# Altium PCB DC-DC_10-40V_8A.PcbDoc
Units mm, origin at the board's own origin, x right, y up, seen from the top; angles counter-clockwise.
Board outline 47.43 x 22.75 mm, 2 copper layers (Top Layer, Bottom Layer); 20 components, 12 nets, 63 pads, 163 vias.
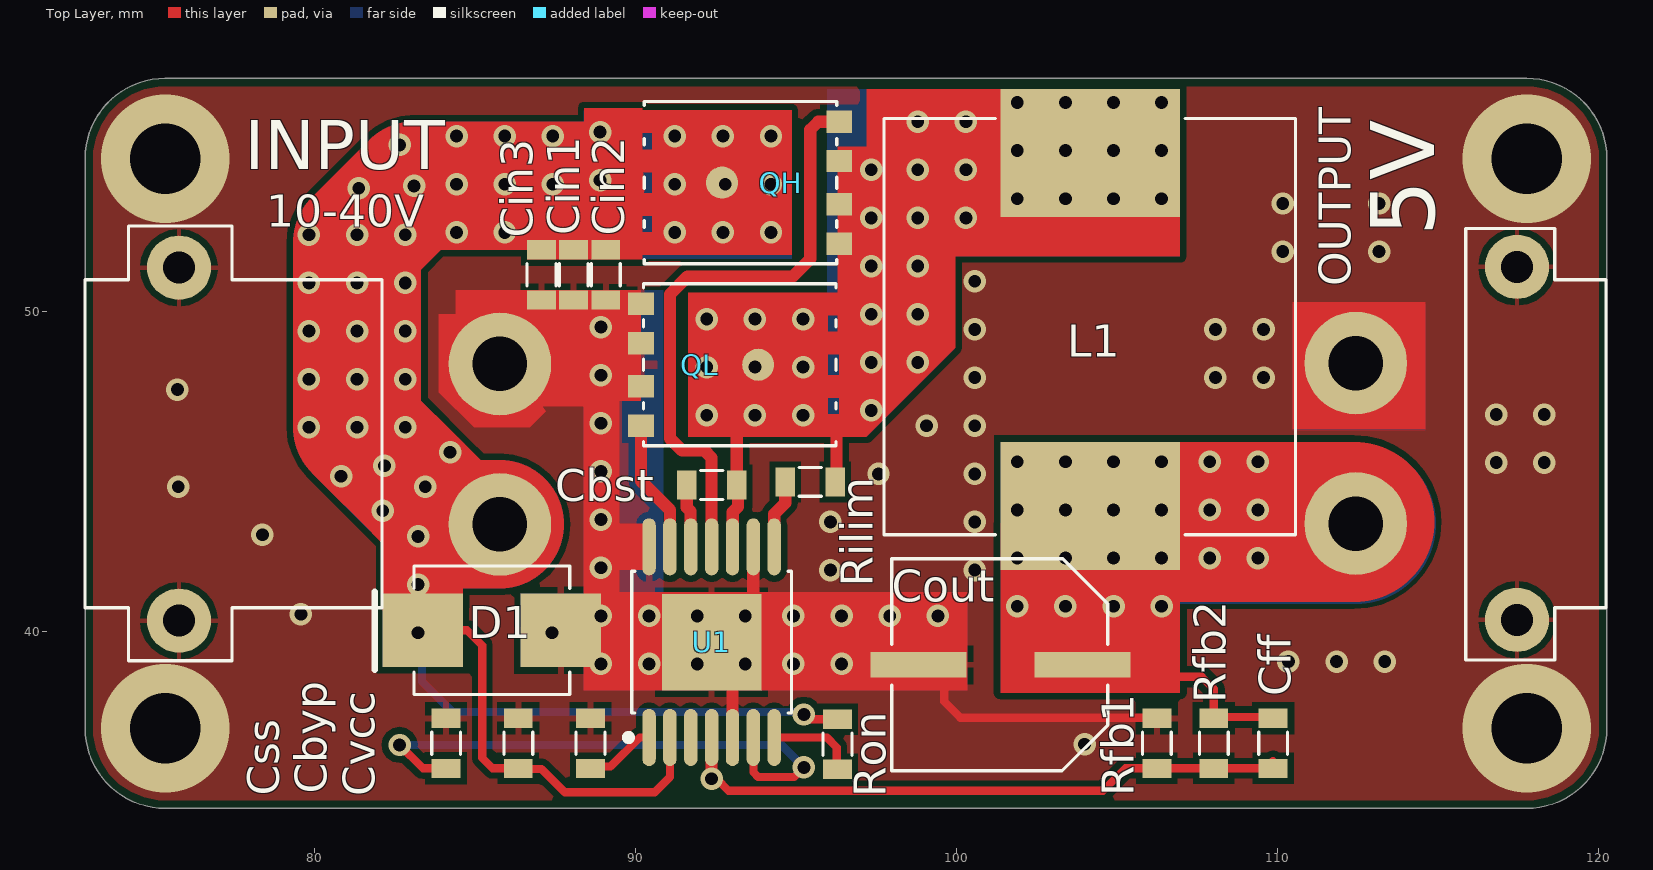
[diagram p0: Top Layer view]
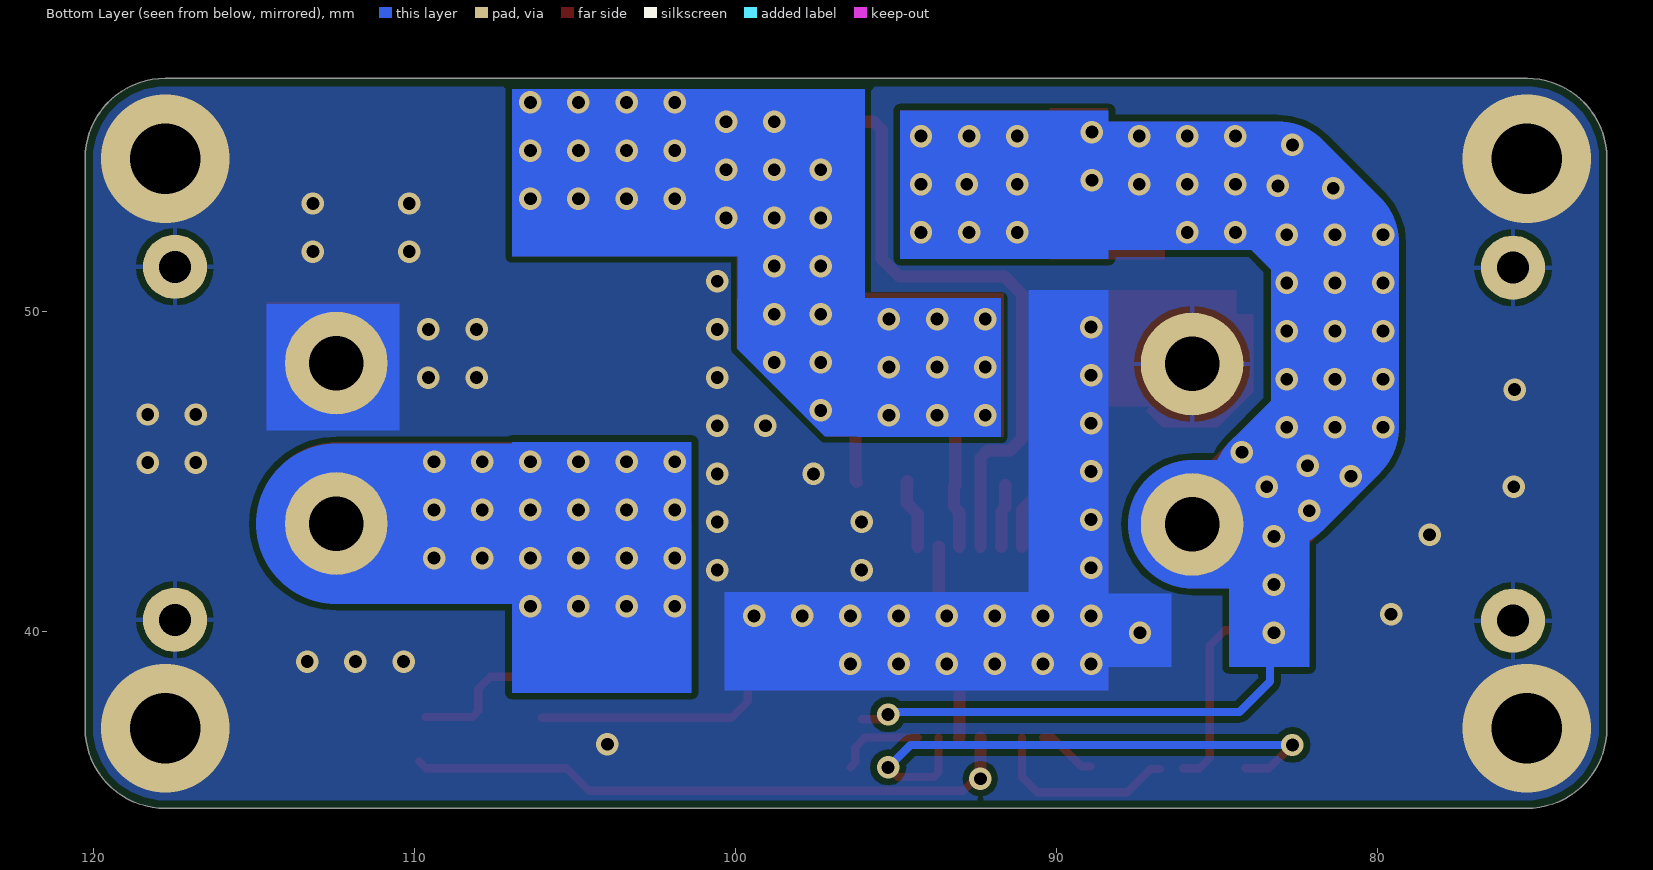
[diagram p1: Bottom Layer view, seen from below]
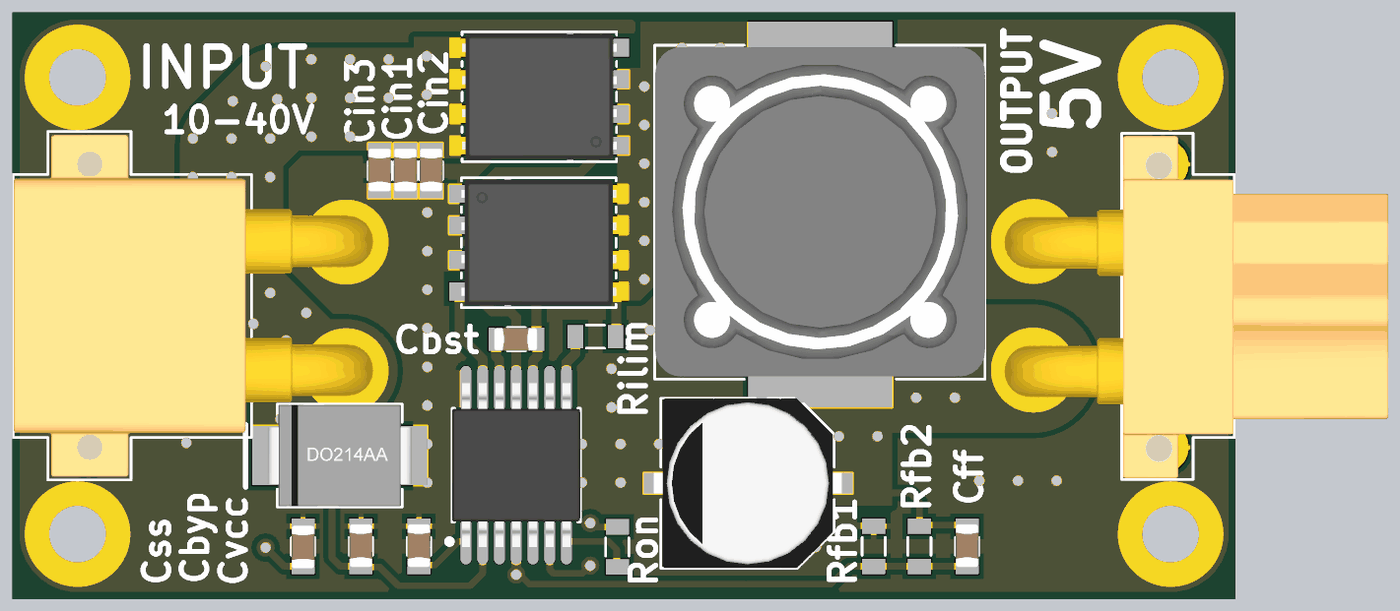
[diagram p2: 3D render of the assembled board from above, using the file's embedded part models]

## Layer stack, top to bottom
Top Solder: solder mask 0.0102, Solder Resist, Dk 3.5
Top Layer: signal copper 0.0356
Dielectric 1: dielectric 0.32, FR-4, Dk 4.8
Bottom Layer: signal copper 0.0356
Bottom Solder: solder mask 0.0102, Solder Resist, Dk 3.5

## Board outline
72.85,37 72.85,54.75 cw(c75.35,54.75) 75.35,57.25 75.325,57.25 117.775,57.25 cw(c117.775,54.75) 120.275,54.75 120.275,37 cw(c117.775,37) 117.775,34.5 117.825,34.5 75.35,34.5 cw(c75.35,37)

## Design rules (kind name [scope] priority, off if disabled: settings)
AcuteAngle [All] p1: minimum=3.50000000000000E+0001 checktracksonly=FALSE
BoardOutlineClearance "BoardOutlineClearance 1" [All] p1: gap=0.25 ignorepadtopadclearanceinfootprint=FALSE except(0: Arc-SplitContinuation Track-SplitContinuation SMDPad-SplitContinuation THPad-SplitContinuation Via-SplitContinuation Fill-SplitContinuation Poly-SplitContinuation Region-SplitContinuation Text-SplitContinuation) // Milling
Clearance "Clearance-1 1/2 Oz" [All] p1: gap=0.125 ignorepadtopadclearanceinfootprint=FALSE except(0.2: Arc-Fill Arc-Poly Track-Fill Track-Poly SMDPad-SMDPad SMDPad-Fill SMDPad-Poly THPad-Fill THPad-Poly Via-Fill Via-Poly Fill-Fill Fill-Poly Poly-Poly Poly-Region Poly-Text; 0.25: Arc-Hole Track-Hole SMDPad-Hole THPad-Hole Via-Hole Fill-Hole Poly-Hole Region-Hole Text-Hole) // Standart
ComponentClearance [All] p1: gap=0.1 collisioncheckmode=3 verticalgap=0.1 showdistances=FALSE
DiffPairsRouting "DiffPairsRouting 1/2 Oz" [All] p1: maxlimit=0.254 minlimit=0.125 mostfreqgap=0.254 toplayer_minwidth=0.125 toplayer_maxwidth=0.381 toplayer_prefwidth=0.381 bottomlayer_minwidth=0.125 bottomlayer_maxwidth=0.381 bottomlayer_prefwidth=0.381 maxuncoupledlength=12.7
HoleSize "Minimum HoleSize" [IsPad] p1: absolutevalues=TRUE maxlimit=5.9 minlimit=0.6 maxpercent=80.000 minpercent=20.000
HoleSize "Minimum HoleSize VIA 1" [IsVia] p2: absolutevalues=TRUE maxlimit=5.9 minlimit=0.3 maxpercent=80.000 minpercent=20.000 // Standart
HoleToHoleClearance Hole2HoleClearance [All] p1: gap=0.25 allowstackedmicrovias=FALSE
MinimumAnnularRing "Minimum AR VIA Standart" [All] p1: minimumring=0.15
MinimumAnnularRing "Minimum AR PAD Standart" [All] p2: minimumring=0.2
MinimumSolderMaskSliver "SolderMask Bridge Standart" [All] p1: minsoldermaskwidth=0.15 // All Masks
PlaneClearance "PlaneClearance-1 1/2 Oz" [All] p1: clearance=0.2 // Standart
PlaneConnect "TermalConnect-1 1/2 Oz" [All] p1: planeconnectstyle=Relief reliefexpansion=0.2 reliefentries=4 reliefconductorwidth=0.2 reliefairgap=0.2 // Standart
PolygonConnect "PolygonConnect-1 1/2 Oz" [All] p1: thpad.connectstyle=Relief thpad.reliefconductorwidth=0.15 thpad.reliefentries=4 thpad.polygonreliefangle="90 Angle" thpad.airgapwidth=0.2 smdpad.connectstyle=Relief smdpad.reliefconductorwidth=0.2 smdpad.reliefentries=4 smdpad.polygonreliefangle="90 Angle" smdpad.airgapwidth=0.2 via.connectstyle=Direct via.reliefconductorwidth=0.254 via.reliefentries=4 via.polygonreliefangle="90 Angle" via.airgapwidth=0.254 // Standart
RoutingCorners [All] p1 off: cornerstyle=45-Degree minsetback=2.54 maxsetback=2.54
RoutingVias [All] p1: holewidth=0.4 width=0.8 viastyle="Through Hole" minholewidth=0.3 minwidth=0.6 maxholewidth=5.9 maxwidth=8.9
SilkToSilkClearance Silk2SilkClearance [All] p1 off: silktosilkclearance=0.15
SilkToSolderMaskClearance Silk2SolderMaskClearance [IsPad] p1 off: minsilkscreentomaskgap=0.15 clearancetoexposedcopper=TRUE
SolderMaskExpansion SolderMaskExpansion-1 [All] p1: expansion=0.05 istentingtop=FALSE // Standart
UnRoutedNet [All] p1: checkbadconnections=TRUE
Width "Width 1/2 Oz" [All] p1: maxlimit=10 minlimit=0.125 preferedwidth=0.254 checkconnectedcopper=TRUE
19 further rules are at their usual default settings.

## Components (designator, comment, footprint, x,y, rotation, side; value= is the part's Value field where it differs from the comment)
Cbst "470nF" "0603 Capicator" 92.38,44.575 r180 top
Cbyp "0.1uF" "0603 Capicator" 86.35,36.525 r90 top
Cff "180pF" "0603 Capicator" 109.875,36.525 r90 top
Cin1 "10uF" "0603 Capicator" 88.075,51.125 r90 top
Cin2 "10uF" "0603 Capicator" 89.075,51.125 r90 top
Cin3 "10uF" "0603 Capicator" 87.075,51.125 r90 top
Cout "220uF" "Bar Cap 6.3x7.7" 98.825,38.975 r90 top
Css "0.015uF" "0603 Capicator" 84.1,36.525 r270 top
Cvcc "2.2uF" "0603 Capicator" 88.6,36.525 r90 top
D1 "TVS 36V" SMB 85.525,40.05 r180 top
INPUT "XT30" "HEADER 2 XT30PW Male" 85.775,43.35 r90 top (schematic designator Power)
L1 "15uH" "Inductor 12.8 x 12.8 x 8.0" 104.175,49.425 r270 top
OUTPUT "XT30" "HEADER 2 XT30PW FeMale" 112.45,48.375 r270 top
QH "MOSFET-N" VSON 92.7,54 r180 top
QL "MOSFET-N" VSON 93.825,48.325 r0 top
Rfb1 "10k" "0603 Resistor" 106.25,36.525 r270 top
Rfb2 "75k" "0603 Resistor" 108.025,36.525 r90 top
Rilim "1k" "0603 Resistor" 95.45,44.675 r0 top
Ron "91k" "0603 Resistor" 96.3,36.5 r90 top
U1 "DC/DC" HTSSOP-14 92.375,39.68 r90 top

## Footprints (in the part's own frame and the unit in brackets; to place one, negate y for a bottom-side part, rotate by r counter-clockwise, add the part's x,y. Pads: shape width x height; smd on the part's side, far side on the other; paste and mask are expansions set on the pad)
"0603 Capicator" [mm]
  rect 0.6x0.9 smd: 1(-0.78,0) 2(0.78,0)
  silkscreen extent -0.35,-0.45 0.35,0.45, body extent -0.82,-0.45 0.88,0.45, height 0.9
"0603 Resistor" [mm]
  rect 0.6x0.9 smd: 1(-0.78,0) 2(0.78,0)
  silkscreen extent -0.35,-0.45 0.35,0.45, body extent -0.85,-0.45 0.85,0.45, height 0.55
"Bar Cap 6.3x7.7" [mm]
  rect 0.8x3 smd: 1(0,0) 2(0,-5.105)
  silkscreen extent -3.3,-5.89 3.3,0.84, body extent -3.3,-6.19 3.3,1.11, height 7.7
"HEADER 2 XT30PW FeMale" [mm]
  round 3.2 hole 1.7: 1(0,0) 2(5,0)
  round 2 hole 1: A(-3,5.025) A(8,5.025)
  silkscreen extent -4.2,3.43 9.25,7.8, body extent -4.1,-1.13 9.2,13.78, height 5
"HEADER 2 XT30PW Male" [mm]
  round 3.2 hole 1.7: 1(0,0) 2(5,0)
  round 2 hole 1: A(-3,10) A(8,10)
  silkscreen extent -4.25,3.67 9.3,12.93, body extent -4.12,-1.05 9.18,12.9, height 5.1
HTSSOP-14 [mm]
  oval 1.78x0.42 smd mask+0.03: 1(-2.97,1.95) 2(-2.97,1.3) 3(-2.97,0.65) 4(-2.97,0) 5(-2.97,-0.65) 6(-2.97,-1.3) 7(-2.97,-1.95) 8(2.97,-1.95) 9(2.97,-1.3) 10(2.97,-0.65) 11(2.97,0) 12(2.97,0.65) 13(2.97,1.3) 14(2.97,1.95)
  rect 3x3.1 smd mask+0.03: A(0,0)
  silkscreen extent -3.07,-2.49 2.21,2.69, body extent -3.19,-2.49 3.19,2.49, height 1.1
"Inductor 12.8 x 12.8 x 8.0" [mm]
  rect 4x5.6 smd: 1(-5.5,0) 2(5.5,0)
  silkscreen extent -6.58,-6.43 6.4,6.4, body extent -6.5,-6.4 6.3,6.4, height 8
SMB [mm]
  rect 2.5x2.3 smd: 1(-2.15,0) 2(2.15,0)
  silkscreen extent -2.42,-2 3.65,2, body extent -2.79,-1.97 2.79,1.97, height 2.65
VSON [mm]
  rect 0.8x0.7 smd: 1(-3.65,-1.9) 3(-3.65,-0.675) 3(-3.65,0.675) 3(-3.65,1.9)
  round 1 smd: 2(0,0)
  Top Layer region: 2.175,-1.55 2.175,-1.025 2.875,-1.025 2.875,-0.325 2.175,-0.325 2.175,0.325 2.875,0.325 2.875,1.025 2.175,1.025 2.175,1.55 2.875,1.55 2.875,2.25 -2.175,2.25 -2.175,-2.25 2.875,-2.25 2.875,-1.55
  silkscreen extent -3.57,-2.53 2.42,2.52, body extent -3.58,-2.45 2.42,2.45, height 1

## Part data
Cbst: library part "Cap 470nF (0603)", "470nF X7R 25V 10% 0603", Manufacturer="Murata Manufacturing", Part Number=GRM188R71E474KA12D, ComponentLink1Description=Chip&Dip, ComponentLink1URL=https://www.chipdip.ru/product/grm188r71e474ka12d, Type=Capacitor
Cbyp: library part "Cap 0.1uF (0603)", "0.1uF X7R 50V 10% 0603", Manufacturer="Murata Manufacturing", Part Number=GRM188R71H104KA93D, ComponentLink1Description=Chip&Dip, ComponentLink1URL=https://www.chipdip.ru/product/grm188r71h104k, Type=Capacitor
Cff: library part "Cap 180pF (0603)", "180pF NP0 50V 5% 0603", Manufacturer="Murata Manufacturing", Part Number=GRM1885C1H181JA01D, ComponentLink1Description=Chip&Dip, ComponentLink1URL=https://www.chipdip.ru/product/grm1885c1h181j, Type=Capacitor
Cin1 Cin2 Cin3: library part "Cap 10uF (0603)", "10uF X5R 25V 20% 0603", Manufacturer="Murata Manufacturing", Part Number=GRM188R61E106M, ComponentLink1Description=Chip&Dip, ComponentLink1URL=https://www.chipdip.ru/product/grm188r61e106m, Type=Capacitor
Cout: library part "Cap Pol 220uF", "ECAP SMD,  10V, 105°C, 20%", Manufacturer=JB, Part Number=JCK1A221M063077, ComponentLink1Description=Chip&Dip, ComponentLink1URL=https://www.chipdip.ru/product0/9000565740, Type=Capacitor
Css: library part "Cap 0.015uF (0603)", "0.015uF X7R 50V 10% 0603", Manufacturer=Taiwan, Part Number=MLCC0.015uFX7R50V10%0603, ComponentLink1Description=Chip&Dip, ComponentLink1URL=https://www.chipdip.ru/product0/895412441, Type=Capacitor
Cvcc: library part "Cap 2.2uF (0603)", "2.2uF X5R 10V 10% 0603", Manufacturer="Murata Manufacturing", Part Number=GRM188R61A225KE34D, ComponentLink1Description=Chip&Dip, ComponentLink1URL=https://www.chipdip.ru/product/grm188r61a225k, Type=Capacitor
D1: library part "TVS Diode 36V (SMB)", "[SMB / DO-214AA], 600W", Manufacturer="ST Microelectronics", Part Number=SMBJ36CA-TR, ComponentLink1Description=DataSheet, ComponentLink1URL=https://static6.arrow.com/aropdfconversion/ee4838c0939fd68177ef9747b63ca424c7b9f39b/519651672847221cd0000.pdf, ComponentLink2Description=Chip&Dip, ComponentLink2URL=https://www.chipdip.ru/product/smbj36ca, Type=Diode
INPUT: library part "Conn2x1 [XT30PW-Male]", Manufacturer=Amass, Part Number=XT30PW, ComponentLink1Description=AliExpress, ComponentLink1URL=https://ru.aliexpress.com/item/4000070113352.html?spm=a2g0o.productlist.0.0.39dd34bfyYuspa&algo_pvid=4d7d83f5-6270-4220-b100-9b5f13b0846d&algo_expid=4d7d83f5-6270-4220-b100-9b5f13b0846d-3&btsid=c67bc929-e3be-4af3-9fd9-25ac13ce4818&ws_ab_test=searchweb0_0,searchweb201602_,searchweb201603_55, Type=Connector
L1: library part "Inductor 15uH (4.5A)", "[B82477G4153M], 15uH, 12.8x12.8, 4.5A", Manufacturer=Epcos, Part Number=B82477G4153M, ComponentLink1Description=DataSheet, ComponentLink1URL=https://static.chipdip.ru/lib/009/DOC001009882.pdf, ComponentLink2Description=Chip&Dip, ComponentLink2URL=https://www.chipdip.ru/product/b82477g4153m, Type=Inductor
OUTPUT: library part "Conn2x1 [XT30PW-Female]", Manufacturer=Amass, Part Number=XT30PW, ComponentLink1Description=AliExpress, ComponentLink1URL=https://ru.aliexpress.com/item/4000070113352.html?spm=a2g0o.productlist.0.0.39dd34bfyYuspa&algo_pvid=4d7d83f5-6270-4220-b100-9b5f13b0846d&algo_expid=4d7d83f5-6270-4220-b100-9b5f13b0846d-3&btsid=c67bc929-e3be-4af3-9fd9-25ac13ce4818&ws_ab_test=searchweb0_0,searchweb201602_,searchweb201603_55, Type=Connector
QH QL: library part "MOSFET-N [CSD]", "[CSD19534Q5AT]. NexFET™ N-channel Power MOSFET designed to minimize losses in power conversion applications", Manufacturer="Texas Instruments", Part Number=CSD19534Q5A, ComponentLink1Description=DataSheet, ComponentLink1URL=http://www.ti.com/lit/ds/symlink/csd19534q5a.pdf, ComponentLink2Description=Chip&Dip, ComponentLink2URL=https://www.chipdip.ru/product/csd19534q5at, Type=Transistor
Rfb1: library part "Res 10k (0603)", "0.1W 0603 10k, 1%", Manufacturer=Taiwan, Part Number=RC0603FR-0710KL, ComponentLink1Description=Chip&Dip, ComponentLink1URL=https://www.chipdip.ru/product0/9000079736, Type=Resistor
Rfb2: library part "Res 75k (0603)", "0.1W 0603 75k, 1%", Manufacturer=Taiwan, Part Number=RC0603FR-0775KL, ComponentLink1Description=Chip&Dip, ComponentLink1URL=https://www.chipdip.ru/product0/9000079757, Type=Resistor
Rilim: library part "Res 1k (0603)", "0.1W 0603 1k, 1%", Manufacturer=Taiwan, Part Number=RC0603FR-071KL, ComponentLink1Description=Chip&Dip, ComponentLink1URL=https://www.chipdip.ru/product0/9000079676, Type=Resistor
Ron: library part "Res 91k (0603)", "0.1W 0603 91k, 1%", Manufacturer=Taiwan, Part Number=RC0603FR-0791KL, ComponentLink1Description=Chip&Dip, ComponentLink1URL=https://www.chipdip.ru/product0/9000079759, Type=Resistor
U1: library part "DC/DC Controller [LM3150]", "The [LM3150MH/NOPB] is a SIMPLE SWITCHER® synchronous Step-down Controller capable of providing up to 12A of output current in a typical application. Operating with an input voltage range of 6V to 42V, the LM3150 features an adjustable output voltage down to 0.6V", Manufacturer="Texas Instruments", PartNumber=LM3150MH/NOPB, ComponentLink1Description=Chip&Dip, ComponentLink1URL=https://www.chipdip.ru/product/lm3150mh-nopb, ComponentLink2Description=DataSheet, ComponentLink2URL=https://static.chipdip.ru/lib/029/DOC001029258.pdf

## Via types
v1: diameter 0.7, hole 0.4, Top Layer to Bottom Layer, tented both sides, 159 vias
v2: diameter 4, hole 2.2, Top Layer to Bottom Layer, 4 vias

## Nets (pads, with @x,y where several pads share a name; then routed paths per layer and width w, separated by ;. In a path a pad name is that pad's centre, name@x,y a point inside that pad or via, vN(x,y) a via of type N, cw(c..) or ccw(c..) an arc to the next point about the centre after c; other vN are vias at no path point)
+5V: Cff.2 Cout.2 L1.2 OUTPUT.2 Rfb2.2 | length 19.4
  Top Layer w0.254: 106.575,38.65 106.625,38.6 107.65,38.6 108.025,38.225 108.025,37.53 108.205,37.35 Cff.2@109.67,37.35
  Top Layer w5: L1.2@104.475,43.425 OUTPUT.2@112.4,43.425
  Bottom Layer w5: 105.05,43.275 105.15,43.375 OUTPUT.2
  other v1: 101.9,40.8 103.4,40.8 104.9,40.8 106.4,40.8 101.9,42.3 103.4,42.3 104.9,42.3 106.4,42.3 107.9,42.3 109.4,42.3 101.9,43.8 103.4,43.8 104.9,43.8 106.4,43.8 107.9,43.8 109.4,43.8 101.9,45.3 103.4,45.3 104.9,45.3 106.4,45.3 107.9,45.3 109.4,45.3
GND: Cbyp.2 Cin1.1 Cin2.1 Cin3.1 Cout.1 Css.1 Cvcc.2 D1.1 INPUT.2 INPUT.A OUTPUT.1 OUTPUT.A QL.3 Rfb1.1 U1.5 U1.9 U1.14 U1.A | length 13.4
  Top Layer w0.254: Cout.1@99.425,39 99.625,38.8 99.625,37.825 100.125,37.325 Rfb1.1@106.045,37.325
  Top Layer w0.3: U1.A@92.244,39.556 U1.A@92.281,39.519 ; U1.A@92.412,39.718 U1.A@93.025,39.105
  Top Layer w0.381: U1.A U1.A@92.412,39.718 ; U1.A@93.025,39.03 U1.5 U1.5@93.032,36.703 ; U1.A@93.31,40.615 93.675,40.98 U1.9
  other v1: 104,36.5 88.925,39 90.425,39 91.925,39 93.425,39 94.925,39 96.425,39 110.35,39.075 111.85,39.075 113.35,39.075 87.4,39.975 88.925,40.5 90.425,40.5 91.925,40.5 93.425,40.5 94.925,40.5 96.425,40.5 97.925,40.5 99.425,40.5 79.575,40.55 96.075,41.925 100.575,41.925 88.925,42 78.375,43.025 96.075,43.425 100.575,43.425 88.925,43.5 75.75,44.525 97.575,44.925 100.575,44.925 88.925,45 116.825,45.275 118.325,45.275 99.075,46.425 100.575,46.425 88.925,46.5 116.825,46.775 118.325,46.775 75.725,47.55 100.575,47.925 108.075,47.925 109.575,47.925 88.925,48 100.575,49.425 108.075,49.425 109.575,49.425 88.925,49.5 100.575,50.925 110.175,51.85 113.175,51.85 110.175,53.35 113.175,53.35
  other v2: 75.35,37 117.775,37 75.35,54.75 117.775,54.75
NetCbst_1: Cbst.1 L1.1 QH.3 QL.2 Rilim.2 U1.10 | length 5.9
  Top Layer w0.381: U1.10 93.032,42.657 93.032,43.732 93.2,43.9 93.2,44.535 Cbst.1 93.16,46.591 93.255,46.686 ; Rilim.2 96.262,44.708 96.262,46.368 96.295,46.4
  other v1: 92.225,46.75 93.725,46.75 95.225,46.75 97.35,46.9 92.225,48.25 93.725,48.25 95.225,48.25 97.35,48.4 98.8,48.4 92.225,49.75 93.725,49.75 95.225,49.75 97.35,49.9 98.8,49.9 97.35,51.4 98.8,51.4 97.35,52.9 98.8,52.9 100.3,52.9 101.9,53.5 103.4,53.5 104.9,53.5 106.4,53.5 97.35,54.4 98.8,54.4 100.3,54.4 101.9,55 103.4,55 104.9,55 106.4,55 98.8,55.9 100.3,55.9 101.9,56.5 103.4,56.5 104.9,56.5 106.4,56.5
NetCbst_2: Cbst.2 U1.12 | length 2
  Top Layer w0.381: Cbst.2 91.6,43.875 91.718,43.757 91.718,42.657 U1.12 U1.12@91.732,42.657
NetCff_1: Cff.1 Rfb1.2 Rfb2.1 U1.4 | length 19.3
  Top Layer w0.254: v1(92.375,35.425) 92.523,35.425 92.898,35.05 104.575,35.05 105.275,35.75 109.655,35.75 Cff.1@109.875,35.97
  Top Layer w0.381: v1(92.375,35.425) U1.4
NetCss_2: Css.2 U1.6 | length 17.5
  Top Layer w0.254: v1(82.65,36.475) 83.375,35.75 Css.2@84.125,35.75 ; U1.6 93.675,35.625 93.825,35.475 94.95,35.475 v1(95.25,35.775)
  Bottom Layer w0.254: v1(82.65,36.475) 94.55,36.475 v1(95.25,35.775)
NetCvcc_1: Cvcc.1 U1.1 | length 1.9
  Top Layer w0.254: Cvcc.1@88.95,35.8 89.225,35.8 90.135,36.71 U1.1
NetQH_1: QH.1 U1.11 | length 18.7
  Top Layer w0.381: U1.11 92.375,45.425 92.15,45.65 91.45,45.65 91.075,46.025 91.075,50.525 91.625,51.075 94.9,51.075 95.45,51.625 95.45,55.65 95.7,55.9 96.335,55.9 QH.1@96.36,55.875
NetQL_1: QL.1 U1.13 | length 4.1
  Top Layer w0.381: QL.1@90.17,46.4 90.17,44.705 91.075,43.8 U1.13
NetRilim_1: Rilim.1 U1.8 | length 2.2
  Top Layer w0.381: U1.8 94.325,43.675 94.67,44.02 Rilim.1 Rilim.1@94.645,44.7
NetRon_1: Ron.1 U1.7 | length 2.8
  Top Layer w0.254: U1.7 95.965,36.71 96.275,36.4 96.275,35.925 Ron.1@96.425,35.775
Vin: Cbyp.1 Cin1.2 Cin2.2 Cin3.2 D1.2 INPUT.1 QH.2 Ron.2 U1.2 | length 82.7
  Top Layer w0.254: D1.2 84.75,40.05 85.225,39.575 85.225,36.075 85.55,35.75 Cbyp.1@86.057,35.75 ; Cbyp.1@86.776,35.724 87.076,35.724 87.8,35 90.6,35 91.075,35.475 U1.2 ; v1(95.25,37.425) 95.4,37.275 Ron.2@96.07,37.275
  Top Layer w0.381: 88.6,52.425 89.3,53.125
  Top Layer w2.5: D1.2@83.375,40.8 v1@83.375,42.975
  Top Layer w4: v1@82.35,45.35 v1(81.325,46.375) ; v1@83.312,44.388 v1@83.375,44.325 ; INPUT.1 84.35,43.35 v1@83.375,44.325 ; 88.275,53.9 88.075,53.9 87.775,53.9 85.925,53.9 84.425,53.9 v1(83.1,53.9) 81.325,52.125 v1(81.325,50.875) v1(81.325,49.375) v1(81.325,47.875) v1(81.325,46.375) ; v1(81.325,46.375) v1@83.375,44.325
  Bottom Layer w0.254: 83.4,39.375 83.35,39.325 83.35,38.45 84.3,37.5 v1@95.275,37.5
  Bottom Layer w4: v1(81.325,47.875) v1@81.325,52.125 ; v1(81.325,49.375) v1@81.325,52.125 ; v1(81.325,50.875) v1@81.325,52.125 ; v1@83.15,44.55 v1(81.325,46.375) v1@81.325,52.125 ; INPUT.1@84.35,43.35 INPUT.1 ; v1@84.425,53.9 88.375,53.9 ; v1@85.925,53.9 88.375,53.9 ; v1@81.325,52.125 v1(83.1,53.9) 88.375,53.9
  other v1: 83.225,39.975 83.225,41.475 83.225,42.975 82.125,43.775 83.45,44.525 80.825,44.85 82.175,45.175 84.225,45.6 79.825,46.375 82.825,46.375 79.825,47.875 82.825,47.875 79.825,49.375 82.825,49.375 79.825,50.875 82.825,50.875 79.825,52.375 81.325,52.375 82.825,52.375 84.425,52.45 85.925,52.45 91.225,52.45 92.725,52.45 94.225,52.45 81.375,53.825 84.425,53.95 85.925,53.95 87.425,53.95 91.225,53.95 92.8,53.95 94.225,53.95 88.9,54.075 82.65,55.175 84.425,55.45 85.925,55.45 87.425,55.45 91.225,55.45 92.725,55.45 94.225,55.45 88.9,55.575
pads on no net: U1.3

## Polygon pours and split planes (outlines as drawn)
GND on Top Layer "Top Layer-No Net" (solid, remove dead copper, pour order 0): 72.85,37 72.85,54.75 cw(c75.35,54.75) 75.35,57.25 75.325,57.25 117.775,57.25 cw(c117.775,54.75) 120.275,54.75 120.275,37 cw(c117.775,37) 117.775,34.5 117.825,34.5 75.35,34.5 cw(c75.35,37)
GND on Bottom Layer "Top Layer-No Net1" (solid, remove dead copper, pour order 1): 72.85,37 72.85,54.75 cw(c75.35,54.75) 75.35,57.25 75.325,57.25 117.775,57.25 cw(c117.775,54.75) 120.275,54.75 120.275,37 cw(c117.775,37) 117.775,34.5 117.825,34.5 75.35,34.5 cw(c75.35,37)

## Other copper
Top Layer:
  region net GND: 114.625,50.275 110.475,50.275 110.475,46.325 114.625,46.325
  rectangle net GND: 84.4,47.025 89.1,50.65
  rectangle net Vin: 86.625,51.6 89.525,52.275
  rectangle net NetCbst_1: 97.2,54.975 101.6,56.925
  rectangle net GND: 89,41.925 90.4,43.375
  rectangle net GND: 88.375,40.5 89.5,47.475
  rectangle net GND: 88.375,38.175 100.35,41.25
  rectangle net NetCbst_1: 98.25,51.7 106.975,55.125
  rectangle net +5V: 101.375,38.1 106.975,43.4
  rectangle net NetCbst_1: 96.3,49.337 99.975,55.125
  rectangle net GND: 88.375,47.2 90.17,50.65
  rectangle net Vin: 88.4,51.6 90.225,56.325
  region net NetCbst_1: 99.975,50.35 99.975,48.85 97.2,46.075 96.35,46.075 96.35,49.525 96.325,49.55 97.15,50.375 97.35,50.375
  region net GND: 87.2,46.875 86.7,46.375 84.975,46.375 83.875,47.475 83.875,49.9 84.95,49.9 85.025,49.975
Bottom Layer:
  rectangle net GND: 110.475,46.275 114.625,50.225
  rectangle net GND: 86.425,38.9 89.125,41.2
  rectangle net Vin: 82.125,38.9 84.625,43.7
  rectangle net +5V: 101.375,38.1 106.975,45.925
  rectangle net GND: 88.375,38.175 100.35,41.25
  rectangle net NetCbst_1: 91.725,46.075 96.225,50.4
  rectangle net NetCbst_1: 95.975,49.325 99.95,53.025
  rectangle net NetCbst_1: 95.975,51.7 106.975,56.925
  rectangle net GND: 88.375,41.125 90.875,50.65
  rectangle net Vin: 88.375,51.625 94.875,56.25
  region net NetCbst_1: 99.95,50.371 99.95,48.825 97.225,46.1 95.9,46.1 95.9,49.55 95.875,49.575 96.7,50.4 96.9,50.4

## Silkscreen, mask and mechanical layers (free items; w line width, h text height)
Top Overlay:
  text "10-40V" at 78.5,52.625 h1
  text "5V" at 114.9,52.325 h2 r90
Mechanical 1:
  lines w0.1: 72.85,54.75 cw(c75.35,54.75) 75.35,57.25 ; 72.85,54.8 72.85,37 ccw(c75.35,37) 75.35,34.5 117.825,34.5 ; 75.325,57.25 117.775,57.25 cw(c117.775,54.75) 120.275,54.75 ; 117.775,34.5 ccw(c117.775,37) 120.275,37 120.275,54.775